# Altium PCB AT32.PcbDoc (part 2 of 9)
Units mm, origin at the board's own origin, x right, y up, seen from the top; angles counter-clockwise.
Board outline 152.1 x 84.6 mm, 2 copper layers (Top Layer, Bottom Layer); 49 components, 58 nets, 223 pads, 0 vias.
Unrouted connection lines stored in the file: 3.
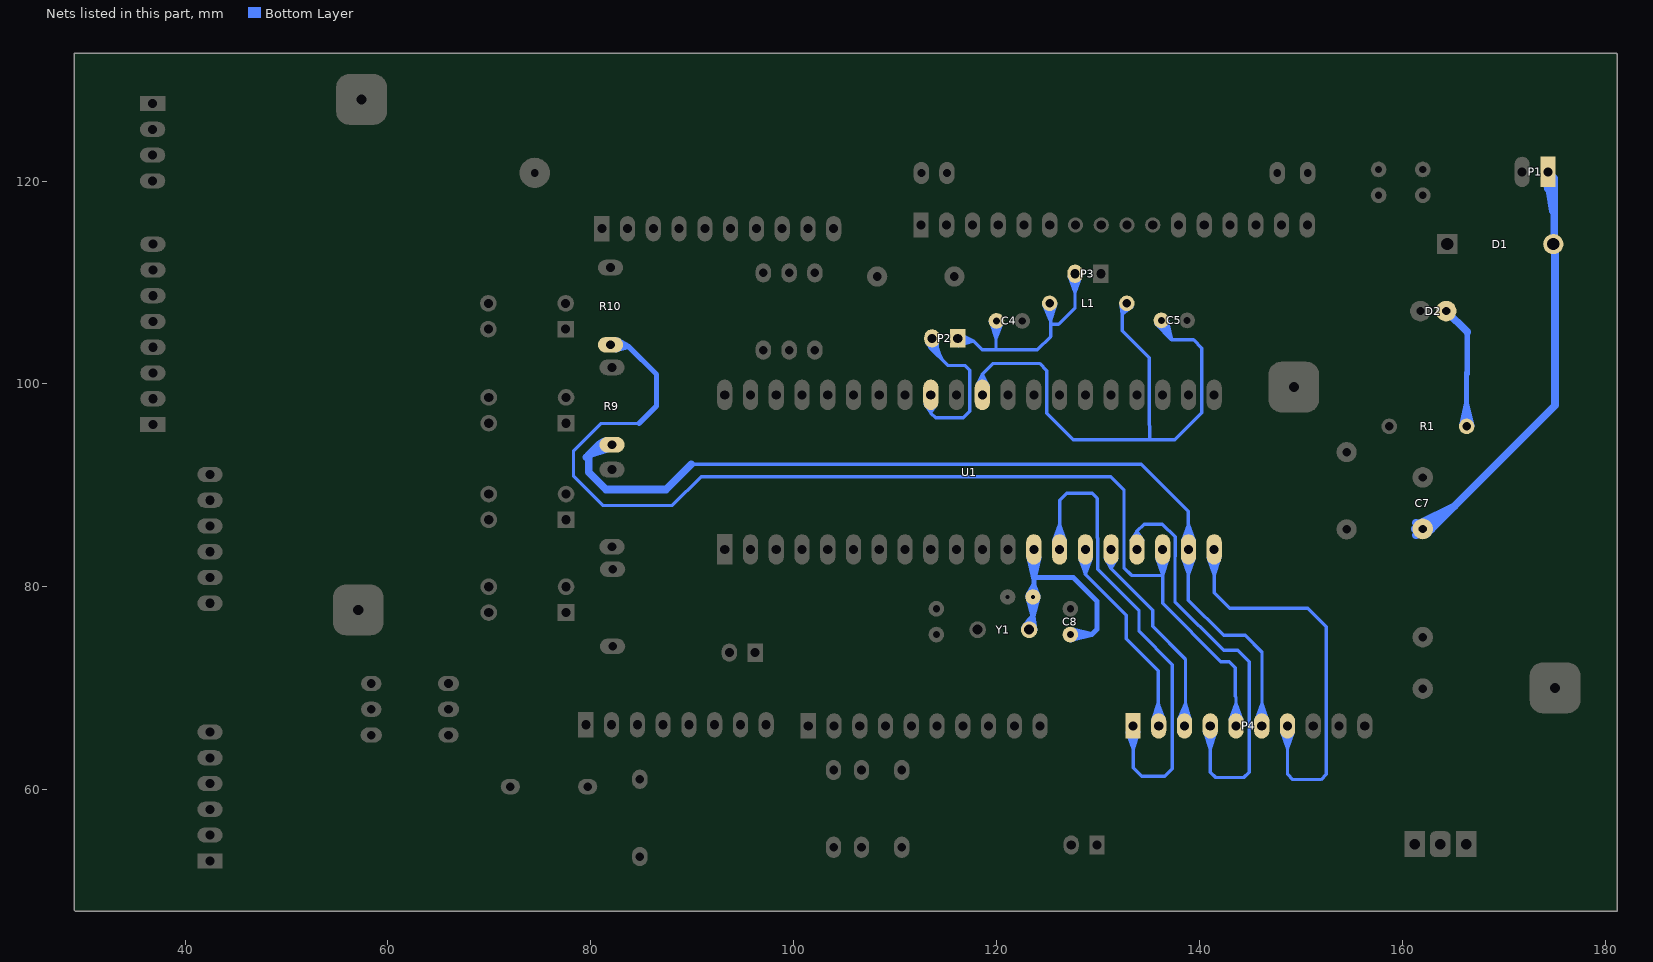
[diagram p2: the nets of this part, all layers, seen from the top]

## Nets (pads, with @x,y where several pads share a name; then routed paths per layer and width w, separated by ;. In a path a pad name is that pad's centre, name@x,y a point inside that pad or via, vN(x,y) a via of type N, cw(c..) or ccw(c..) an arc to the next point about the centre after c; other vN are vias at no path point) (continued)
NetC4_1: C4.1 L1.1 P2.1 P3.2 | length 269.3
  Bottom Layer w0.33: P2.1@116.188,104.228 117.748,104.228 ; P2.1@116.402,104.541 ccw(c117.058,105.07) 117.058,104.228 ; P2.1@116.616,103.941 cw(c117.309,103.248) 117.309,104.228 ; P2.1@116.659,104.749 ccw(c117.748,105.628) 117.748,104.228 ; C4.1@119.57,105.784 cw(c118.629,104.843) 119.96,104.843 ; 119.96,104.66 cw(c121.55,104.66) C4.1@120.426,105.784 ; L1.1@124.809,107.516 cw(c123.535,106.242) 125.337,106.242 ; L1.1@125.043,107.75 cw(c124.332,107.039) 125.337,107.039 ; 125.337,106.725 cw(c126.456,106.725) L1.1@125.665,107.516 ; L1.1@125.337,107.944 125.337,105.9 ; P3.2@127.322,110.307 cw(c126.289,109.274) 127.75,109.274 cw(c129.211,109.274) P3.2@128.178,110.307 ; P3.2@127.75,110.865 127.75,107.53 126.12,105.9 125.337,105.9 ; P2.1@116.187,104.094 117.748,104.228 ; P2.1@116.187,104.094 117.748,104.228 ; P2.1@116.187,104.094 117.748,104.228 ; P2.1@116.187,104.094 117.748,104.228 ; P2.1@116.187,104.094 117.748,104.228 ; P2.1@116.187,104.094 117.748,104.228 ; P2.1@116.187,104.094 117.748,104.228 ; P2.1@116.188,104.369 117.748,104.228 ; P2.1@116.188,104.369 117.748,104.228 ; P2.1@116.188,104.369 117.748,104.228 ; P2.1@116.188,104.369 117.748,104.228 ; P2.1@116.188,104.369 117.748,104.228 ; P2.1@116.188,104.369 117.748,104.228 ; P2.1@116.188,104.369 117.748,104.228 ; P2.1@116.237,104.639 117.748,104.228 ; P2.1@116.237,104.639 117.748,104.228 ; P2.1@116.237,104.639 117.748,104.228 ; P2.1@116.237,104.639 117.748,104.228 ; P2.1@116.237,104.639 117.748,104.228 ; P2.1@116.237,104.639 117.748,104.228 ; P2.1@116.237,104.639 117.748,104.228 ; P2.1@116.251,103.767 117.748,104.228 ; P2.1@116.251,103.767 117.748,104.228 ; P2.1@116.251,103.767 117.748,104.228 ; P2.1@116.251,103.767 117.748,104.228 ; P2.1@116.251,103.767 117.748,104.228 ; P2.1@116.251,103.767 117.748,104.228 ; P2.1@116.251,103.767 117.748,104.228 ; P2.1@116.358,104.949 117.748,104.228 ; P2.1@116.358,104.949 117.748,104.228 ; P2.1@116.358,104.949 117.748,104.228 ; P2.1@116.358,104.949 117.748,104.228 ; P2.1@116.358,104.949 117.748,104.228 ; P2.1@116.358,104.949 117.748,104.228 ; P2.1@116.358,104.949 117.748,104.228 ; 117.748,104.228 118.596,103.38 119.96,103.38 ; C4.1@119.4,106.121 119.96,104.451 ; C4.1@119.4,106.121 119.96,104.451 ; C4.1@119.4,106.121 119.96,104.451 ; C4.1@119.4,106.121 119.96,104.451 ; C4.1@119.4,106.121 119.96,104.451 ; C4.1@119.4,106.121 119.96,104.451 ; C4.1@119.4,106.121 119.96,104.452 ; C4.1@119.723,106.196 119.96,104.451 ; C4.1@119.723,106.196 119.96,104.451 ; C4.1@119.723,106.196 119.96,104.451 ; C4.1@119.723,106.196 119.96,104.451 ; C4.1@119.723,106.196 119.96,104.451 ; C4.1@119.723,106.196 119.96,104.451 ; C4.1@119.723,106.196 119.96,104.452 ; 119.96,103.38 124.04,103.38 125.337,104.677 125.337,105.9 ; 119.96,103.38 119.96,106.174 C4.1@119.998,106.212 ; 119.96,104.451 C4.1@120.592,106.095 ; 119.96,104.451 C4.1@120.272,106.185 ; 119.96,104.451 C4.1@119.998,106.212 ; 119.96,104.451 C4.1@120.592,106.095 ; 119.96,104.451 C4.1@120.272,106.185 ; 119.96,104.451 C4.1@119.998,106.212 ; 119.96,104.451 C4.1@120.592,106.095 ; 119.96,104.451 C4.1@120.272,106.185 ; 119.96,104.451 C4.1@119.998,106.212 ; 119.96,104.451 C4.1@120.592,106.095 ; 119.96,104.451 C4.1@120.272,106.185 ; 119.96,104.451 C4.1@119.998,106.212 ; 119.96,104.451 C4.1@120.592,106.095 ; 119.96,104.451 C4.1@120.272,106.185 ; 119.96,104.451 C4.1@119.998,106.212 ; 119.96,104.451 C4.1@120.592,106.095 ; 119.96,104.451 C4.1@120.272,106.185 ; 119.96,104.451 C4.1@119.998,106.212 ; 119.96,104.452 C4.1@120.592,106.095 ; 119.96,104.452 C4.1@120.272,106.185 ; L1.1@124.648,107.807 125.337,106.182 ; L1.1@124.648,107.807 125.337,106.182 ; L1.1@124.648,107.807 125.337,106.182 ; L1.1@124.648,107.807 125.337,106.182 ; L1.1@124.648,107.807 125.337,106.182 ; L1.1@124.648,107.807 125.337,106.182 ; L1.1@124.648,107.807 125.337,106.186 ; L1.1@124.964,107.907 125.337,106.182 ; L1.1@124.964,107.907 125.337,106.182 ; L1.1@124.964,107.907 125.337,106.182 ; L1.1@124.964,107.907 125.337,106.182 ; L1.1@124.964,107.907 125.337,106.182 ; L1.1@124.964,107.907 125.337,106.182 ; L1.1@124.964,107.907 125.337,106.186 ; L1.1@125.237,107.944 125.337,106.182 ; L1.1@125.237,107.944 125.337,106.182 ; L1.1@125.237,107.944 125.337,106.182 ; L1.1@125.237,107.944 125.337,106.182 ; L1.1@125.237,107.944 125.337,106.182 ; L1.1@125.237,107.944 125.337,106.182 ; 125.337,106.186 L1.1@125.838,107.874 ; 125.337,106.186 L1.1@125.512,107.938 ; 125.337,106.182 L1.1@125.838,107.874 ; 125.337,106.182 L1.1@125.512,107.938 ; 125.337,106.182 L1.1@125.838,107.874 ; 125.337,106.182 L1.1@125.512,107.938 ; 125.337,106.182 L1.1@125.838,107.874 ; 125.337,106.182 L1.1@125.512,107.938 ; 125.337,106.182 L1.1@125.838,107.874 ; 125.337,106.182 L1.1@125.512,107.938 ; 125.337,106.182 L1.1@125.838,107.874 ; 125.337,106.182 L1.1@125.512,107.938 ; 125.337,106.182 L1.1@125.838,107.874 ; 125.337,106.182 L1.1@125.512,107.938 ; P3.2@127.154,110.631 127.75,108.975 ; P3.2@127.154,110.631 127.75,108.975 ; P3.2@127.154,110.631 127.75,108.975 ; P3.2@127.154,110.631 127.75,108.975 ; P3.2@127.154,110.631 127.75,108.975 ; P3.2@127.154,110.631 127.75,108.975 ; P3.2@127.154,110.631 127.75,108.975 ; P3.2@127.476,110.714 127.75,108.975 ; P3.2@127.476,110.714 127.75,108.975 ; P3.2@127.476,110.714 127.75,108.975 ; P3.2@127.476,110.714 127.75,108.975 ; P3.2@127.476,110.714 127.75,108.975 ; P3.2@127.476,110.714 127.75,108.975 ; P3.2@127.476,110.714 127.75,108.975 ; 127.75,108.975 P3.2@128.346,110.631 ; 127.75,108.975 P3.2@128.024,110.714 ; 127.75,108.975 P3.2@127.75,110.735 ; 127.75,108.975 P3.2@128.346,110.631 ; 127.75,108.975 P3.2@128.024,110.714 ; 127.75,108.975 P3.2@127.75,110.735 ; 127.75,108.975 P3.2@128.346,110.631 ; 127.75,108.975 P3.2@128.024,110.714 ; 127.75,108.975 P3.2@127.75,110.735 ; 127.75,108.975 P3.2@128.346,110.631 ; 127.75,108.975 P3.2@128.024,110.714 ; 127.75,108.975 P3.2@127.75,110.735 ; 127.75,108.975 P3.2@128.346,110.631 ; 127.75,108.975 P3.2@128.024,110.714 ; 127.75,108.975 P3.2@127.75,110.735 ; 127.75,108.975 P3.2@128.346,110.631 ; 127.75,108.975 P3.2@128.024,110.714 ; 127.75,108.975 P3.2@127.75,110.735 ; 127.75,108.975 P3.2@128.346,110.631 ; 127.75,108.975 P3.2@128.024,110.714 ; 127.75,108.975 P3.2@127.75,110.735
NetC5_2: C5.2 L1.2 U1.30 | length 245.5
  Bottom Layer w0.33: U1.30@118.228,100.123 ccw(c117.526,100.951) 118.612,100.951 ; U1.30@118.606,98.927 118.407,99.126 118.612,99.331 118.612,100.952 ; U1.30@118.991,100.118 cw(c119.718,100.951) 118.612,100.951 ; L1.2@132.957,107.944 132.957,107.457 132.4,106.9 ; 135.06,97.32 135.1,94.5 ; 135.071,97.331 135.071,99.595 135.06,99.606 135.06,102.582 132.4,105.242 132.4,106.9 ; C5.2@135.762,105.908 137.151,104.489 ; C5.2@135.767,105.901 137.116,104.578 ; C5.2@135.774,105.892 137.131,104.617 ; C5.2@135.778,105.887 137.227,104.529 ; C5.2@135.779,105.885 137.172,104.607 ; C5.2@136.018,106.119 137.151,104.489 ; C5.2@136.019,106.117 137.116,104.578 ; C5.2@136.022,106.113 137.131,104.617 ; C5.2@136.024,106.109 137.172,104.607 ; C5.2@136.024,106.109 137.227,104.529 ; C5.2@136.209,106.292 ccw(c136.813,105.868) 136.291,105.346 ; C5.2@136.479,106.102 ccw(c137.139,105.639) 136.569,105.068 ; C5.2@136.503,106.378 137.227,104.529 ; C5.2@136.503,106.376 137.172,104.607 ; C5.2@136.506,106.371 137.131,104.617 ; C5.2@136.507,106.367 137.151,104.489 ; C5.2@136.507,106.367 137.116,104.578 ; C5.2@136.749,105.912 ccw(c137.465,105.41) 136.847,104.791 ; C5.2@136.82,106.473 137.227,104.529 ; C5.2@136.823,106.465 137.172,104.607 ; C5.2@136.827,106.454 137.131,104.617 ; C5.2@136.829,106.448 137.151,104.489 ; C5.2@136.83,106.446 137.116,104.578 ; U1.30@118.037,99.814 118.612,100.952 ; U1.30@118.037,99.814 118.612,100.952 ; U1.30@118.037,99.814 118.612,100.952 ; U1.30@118.037,99.814 118.612,100.952 ; U1.30@118.037,99.814 118.612,100.952 ; U1.30@118.037,99.814 118.612,100.952 ; U1.30@118.037,99.814 118.612,100.952 ; U1.30@118.352,99.704 118.612,100.952 ; U1.30@118.352,99.704 118.612,100.952 ; U1.30@118.352,99.704 118.612,100.952 ; U1.30@118.352,99.704 118.612,100.952 ; U1.30@118.352,99.704 118.612,100.952 ; U1.30@118.352,99.704 118.612,100.952 ; U1.30@118.352,99.704 118.612,100.952 ; U1.30@118.606,99.677 118.612,100.952 ; U1.30@118.606,99.677 118.612,100.952 ; U1.30@118.606,99.677 118.612,100.952 ; U1.30@118.606,99.677 118.612,100.952 ; U1.30@118.606,99.677 118.612,100.952 ; U1.30@118.606,99.677 118.612,100.952 ; U1.30@118.606,99.677 118.612,100.952 ; 118.612,100.952 119.68,102.02 124.245,102.02 124.96,101.305 124.96,97.1 127.56,94.5 137.6,94.5 140.24,97.14 140.24,103.54 139.428,104.352 137.285,104.352 136.3,105.337 ; 118.612,100.952 U1.30@119.176,99.809 ; 118.612,100.952 U1.30@118.86,99.701 ; 118.612,100.952 U1.30@119.176,99.809 ; 118.612,100.952 U1.30@118.86,99.701 ; 118.612,100.952 U1.30@119.176,99.809 ; 118.612,100.952 U1.30@118.86,99.701 ; 118.612,100.952 U1.30@119.176,99.809 ; 118.612,100.952 U1.30@118.86,99.701 ; 118.612,100.952 U1.30@119.176,99.809 ; 118.612,100.952 U1.30@118.86,99.701 ; 118.612,100.952 U1.30@119.176,99.809 ; 118.612,100.952 U1.30@118.86,99.701 ; 118.612,100.952 U1.30@119.176,99.809 ; 118.612,100.952 U1.30@118.86,99.701 ; L1.2@132.258,108.031 132.4,106.9 ; L1.2@132.258,108.031 132.4,106.9 ; L1.2@132.258,108.031 132.4,106.9 ; L1.2@132.258,108.031 132.4,106.9 ; L1.2@132.258,108.031 132.4,106.9 ; L1.2@132.258,108.031 132.4,106.9 ; L1.2@132.258,108.031 132.4,106.9 ; 132.4,106.9 L1.2@133.327,107.563 ; 132.4,106.9 L1.2@133.094,107.804 ; 132.4,106.9 L1.2@132.594,108.023 ; 132.4,106.9 L1.2@132.857,107.944 ; 132.4,106.9 L1.2@133.327,107.563 ; 132.4,106.9 L1.2@133.094,107.804 ; 132.4,106.9 L1.2@132.594,108.023 ; 132.4,106.9 L1.2@132.857,107.944 ; 132.4,106.9 L1.2@133.327,107.563 ; 132.4,106.9 L1.2@133.094,107.804 ; 132.4,106.9 L1.2@132.594,108.023 ; 132.4,106.9 L1.2@132.857,107.944 ; 132.4,106.9 L1.2@133.327,107.563 ; 132.4,106.9 L1.2@133.094,107.804 ; 132.4,106.9 L1.2@132.594,108.023 ; 132.4,106.9 L1.2@132.857,107.944 ; 132.4,106.9 L1.2@133.327,107.563 ; 132.4,106.9 L1.2@133.094,107.804 ; 132.4,106.9 L1.2@132.594,108.023 ; 132.4,106.9 L1.2@132.857,107.944 ; 132.4,106.9 L1.2@133.327,107.563 ; 132.4,106.9 L1.2@133.094,107.804 ; 132.4,106.9 L1.2@132.594,108.023 ; 132.4,106.9 L1.2@132.857,107.944 ; 132.4,106.9 L1.2@133.327,107.563 ; 132.4,106.9 L1.2@133.094,107.804 ; 132.4,106.9 L1.2@132.594,108.023 ; 132.4,106.9 L1.2@132.857,107.944 ; C5.2@135.693,106.034 136.3,105.337 ; C5.2@135.693,106.034 136.3,105.337 ; C5.2@135.693,106.034 136.3,105.337 ; C5.2@135.693,106.034 136.3,105.337 ; C5.2@135.693,106.034 136.3,105.337 ; C5.2@135.693,106.034 136.3,105.337 ; C5.2@135.693,106.034 136.3,105.337 ; C5.2@135.984,106.206 136.3,105.337 ; C5.2@135.984,106.206 136.3,105.337 ; C5.2@135.984,106.206 136.3,105.337 ; C5.2@135.984,106.206 136.3,105.337 ; C5.2@135.984,106.206 136.3,105.337 ; C5.2@135.984,106.206 136.3,105.337 ; C5.2@135.984,106.206 136.3,105.337 ; C5.2@136.254,106.26 137.258,104.379 ; C5.2@136.254,106.26 136.3,105.337 ; C5.2@136.254,106.26 136.3,105.337 ; C5.2@136.254,106.26 136.3,105.337 ; C5.2@136.254,106.26 136.3,105.337 ; C5.2@136.254,106.26 136.3,105.337 ; C5.2@136.254,106.26 137.227,104.529 ; C5.2@136.254,106.26 137.172,104.607 ; C5.2@136.254,106.26 137.258,104.379 ; C5.2@136.254,106.26 136.3,105.337 ; C5.2@136.254,106.26 137.151,104.489 ; C5.2@136.254,106.26 137.116,104.578 ; 136.3,105.337 C5.2@136.835,106.091 ; 136.3,105.337 C5.2@136.528,106.233 ; 136.3,105.337 C5.2@136.835,106.091 ; 136.3,105.337 C5.2@136.528,106.233 ; 136.3,105.337 C5.2@136.835,106.091 ; 136.3,105.337 C5.2@136.528,106.233 ; 136.3,105.337 C5.2@136.835,106.091 ; 136.3,105.337 C5.2@136.528,106.233 ; 136.3,105.337 C5.2@136.835,106.091 ; 136.3,105.337 C5.2@136.528,106.233 ; 136.3,105.337 C5.2@136.835,106.091 ; 136.3,105.337 C5.2@136.528,106.233 ; 136.3,105.337 C5.2@136.835,106.091 ; 136.3,105.337 C5.2@136.528,106.233 ; 137.258,104.379 136.823,106.466 137.258,104.379 ; 137.258,104.379 135.766,105.902 137.258,104.379 ; 137.258,104.379 136.504,106.374 137.258,104.379 ; 137.258,104.379 136.02,106.115 137.258,104.379
NetC7_1: C7.1 D1.1 P1.1 | length 70.4
  Bottom Layer w0.75: C7.1@161.228,85.704 C7.1@162.904,85.704 ; C7.1@161.351,85.075 C7.1@162.904,85.704 ; C7.1@161.351,86.333 C7.1@162.904,85.704 ; C7.1@161.681,85.251 cw(c162.776,84.156) 162.776,85.704 cw(c162.776,87.252) C7.1@161.681,86.157 ; C7.1@161.697,86.253 165.173,87.973 ; C7.1@162.028,85.704 165.173,87.973 ; C7.1@162.445,85.217 165.173,87.973 ; P1.1@174.103,119.893 cw(c173.463,119.253) 174.368,119.253 cw(c175.273,119.253) P1.1@174.633,119.893 ; P1.1@174.368,120.908 175,120.276 175,113.4 175.072,113.328 175.072,98.072 175.1,98.044 175.1,97.9 C7.1@162.904,85.704 ; P1.1@174.868,120.058 174.868,117.058 ; 174.868,117.058 174.368,120.158 174.868,117.058
NetC8_1: C8.1 pad.1@123.6,79 U1.13 Y1.2 | length 169.6
  Bottom Layer w0.33: U1.13@123.686,83.687 U1.13@124.16,83.213
  Bottom Layer w0.5: Y1.2@122.956,76.287 ccw(c122.733,76.72) 123.22,76.72 ; pad.1@123.238,78.638 cw(c122.364,77.764) 123.6,77.764 cw(c124.836,77.764) pad.1@123.962,78.638 ; pad.1@123.325,79.432 ccw(c122.986,79.965) 123.603,79.828 ; U1.13@123.332,82.583 cw(c122.479,81.73) 123.686,81.73 cw(c124.893,81.73) U1.13@124.04,82.583 ; Y1.2@123.484,76.287 cw(c123.707,76.72) 123.22,76.72 ; 123.604,79.831 ccw(c123.908,79.764) pad.1@123.791,79.475 ; 123.686,80.9 127.6,80.9 129.9,78.6 129.9,75.8 129.395,75.295 ; U1.13@123.686,83.687 123.686,80.2 ; C8.1@127.652,74.927 cw(c128.539,74.039) 128.539,75.295 cw(c128.539,76.55) C8.1@127.652,75.662 ; Y1.2@122.672,75.951 123.22,76.72 ; Y1.2@122.672,75.951 123.22,76.72 ; Y1.2@122.672,75.951 123.22,76.72 ; Y1.2@122.672,75.951 123.22,76.72 ; Y1.2@122.672,75.951 123.22,76.72 ; Y1.2@122.672,75.951 123.22,76.72 ; Y1.2@122.672,75.951 123.22,76.72 ; Y1.2@122.672,75.951 123.22,76.72 ; Y1.2@122.672,75.951 123.22,76.72 ; Y1.2@122.713,76.046 123.6,77.1 ; Y1.2@122.713,76.046 123.6,77.1 ; Y1.2@122.713,76.046 123.6,77.1 ; Y1.2@122.713,76.046 123.6,77.1 ; Y1.2@122.713,76.046 123.6,77.1 ; pad.1@123.093,78.931 123.6,77.1 ; pad.1@123.093,78.931 123.6,77.1 ; pad.1@123.093,78.931 123.6,77.1 ; pad.1@123.093,78.931 123.6,77.1 ; pad.1@123.093,78.931 123.6,77.1 ; pad.1@123.109,79.144 123.686,80.2 ; pad.1@123.109,79.144 123.686,80.2 ; pad.1@123.109,79.144 123.686,80.2 ; pad.1@123.109,79.144 123.686,80.2 ; pad.1@123.109,79.144 123.686,80.2 ; U1.13@123.189,82.881 123.686,80.687 ; U1.13@123.189,82.881 123.686,80.687 ; U1.13@123.189,82.881 123.686,80.687 ; U1.13@123.189,82.881 123.686,80.687 ; U1.13@123.189,82.881 123.686,80.687 ; Y1.2@123.22,75.776 123.22,76.72 ; Y1.2@123.22,75.776 123.6,77.1 ; Y1.2@123.22,75.776 123.22,76.72 ; Y1.2@123.22,75.776 123.6,77.1 ; Y1.2@123.22,75.776 123.6,77.1 ; Y1.2@123.22,75.776 123.22,76.72 ; Y1.2@123.22,75.776 123.22,76.72 ; Y1.2@123.22,75.776 123.22,76.72 ; Y1.2@123.22,75.776 123.6,77.1 ; Y1.2@123.22,75.776 123.22,76.72 ; Y1.2@123.22,75.776 123.22,76.72 ; 123.22,76.72 123.6,77.1 ; 123.22,76.72 Y1.2@123.768,75.951 ; 123.22,76.72 Y1.2@123.768,75.951 ; 123.22,76.72 Y1.2@123.768,75.951 ; 123.22,76.72 Y1.2@123.768,75.951 ; 123.22,76.72 Y1.2@123.768,75.951 ; 123.22,76.72 Y1.2@123.768,75.951 ; 123.22,76.72 Y1.2@123.768,75.951 ; 123.22,76.72 Y1.2@123.768,75.951 ; 123.22,76.72 Y1.2@123.768,75.951 ; 123.6,77.1 123.6,79.3 123.6,79.814 123.686,80.2 ; 123.6,77.1 Y1.2@123.794,75.736 ; 123.6,77.1 pad.1@124.107,78.931 ; 123.6,77.1 pad.1@123.6,79 ; 123.6,77.1 Y1.2@123.794,75.736 ; 123.6,77.1 Y1.2@123.794,75.736 ; 123.6,77.1 Y1.2@123.794,75.736 ; 123.6,77.1 Y1.2@123.794,75.736 ; 123.6,77.1 pad.1@124.107,78.931 ; 123.6,77.1 pad.1@123.6,79 ; 123.6,77.1 pad.1@124.107,78.931 ; 123.6,77.1 pad.1@123.6,79 ; 123.6,77.1 pad.1@124.107,78.931 ; 123.6,77.1 pad.1@124.107,78.931 ; 123.6,77.1 pad.1@123.6,79 ; pad.1@123.6,79 123.686,80.2 ; pad.1@123.6,79 123.686,80.2 ; pad.1@123.6,79 123.686,80.2 ; pad.1@123.6,79 123.686,80.2 ; 123.686,80.2 pad.1@124.107,79.073 ; 123.686,80.2 pad.1@124.107,79.073 ; 123.686,80.2 pad.1@124.107,79.073 ; 123.686,80.2 pad.1@124.107,79.073 ; 123.686,80.2 pad.1@124.107,79.073 ; 123.686,80.687 U1.13@124.183,82.881 ; 123.686,80.687 U1.13@123.686,82.937 ; 123.686,80.687 U1.13@124.183,82.881 ; 123.686,80.687 U1.13@123.686,82.937 ; 123.686,80.687 U1.13@124.183,82.881 ; 123.686,80.687 U1.13@123.686,82.937 ; 123.686,80.687 U1.13@124.183,82.881 ; 123.686,80.687 U1.13@123.686,82.937 ; 123.686,80.687 U1.13@124.183,82.881 ; 123.686,80.687 U1.13@123.686,82.937 ; C8.1@127.284,75.295 129.395,75.295 ; C8.1@127.284,75.295 129.395,75.295 ; C8.1@127.284,75.295 129.395,75.295 ; C8.1@127.348,74.779 129.395,75.295 ; C8.1@127.348,74.779 129.395,75.295 ; C8.1@127.348,74.779 129.395,75.295 ; C8.1@127.348,74.779 129.395,75.295 ; C8.1@127.348,75.811 129.395,75.295 ; C8.1@127.348,75.811 129.395,75.295 ; C8.1@127.348,75.811 129.395,75.295 ; C8.1@127.348,75.811 129.395,75.295
NetD2_1: D2.1 R1.1 | length 37
  Bottom Layer w0.5: R1.1@165.981,96.183 ccw(c165.094,97.07) 166.349,97.07 ccw(c167.604,97.07) R1.1@166.717,96.183 ; 166.349,101.147 R1.1@166.349,95.815 ; R1.1@165.832,95.875 166.349,98.085 ; R1.1@165.832,95.875 166.349,98.085 ; R1.1@165.832,95.875 166.349,98.085 ; R1.1@165.832,95.875 166.349,98.085 ; R1.1@166.349,95.815 166.349,98.085 ; R1.1@166.349,95.815 166.349,98.085 ; 166.349,98.085 R1.1@166.866,95.875 ; 166.349,98.085 R1.1@166.866,95.875 ; 166.349,98.085 R1.1@166.866,95.875 ; 166.349,98.085 R1.1@166.866,95.875
  Bottom Layer w0.55: 166.4,101 166.4,105.126
  Bottom Layer w0.75: D2.1@164.338,107.188 166.4,105.126
NetP2_2: P2.2 U1.32 | length 88.3
  Bottom Layer w0.33: P2.2@113.144,104.034 114.501,102.539 ; P2.2@113.15,104.025 114.471,102.646 P2.2@113.409,104.233 ; P2.2@113.159,104.012 114.491,102.699 ; U1.32@113.221,97.678 cw(c112.889,97.134) 113.526,97.134 cw(c114.163,97.134) U1.32@113.831,97.678 ; P2.2@113.279,104.478 ccw(c114.229,104.197) 113.528,103.496 ; P2.2@113.407,104.236 114.501,102.539 ; P2.2@113.412,104.227 114.491,102.699 ; P2.2@113.448,104.228 113.448,103.576 115.201,101.823 116.877,101.823 117.36,101.34 117.36,97.3 117.28,97.22 116.72,96.66 114,96.66 113.526,97.134 ; U1.32@113.526,98.927 113.526,97.134 ; P2.2@113.595,104.384 ccw(c114.834,104.017) 113.92,103.104 ; P2.2@113.905,104.468 114.501,102.539 ; P2.2@113.912,104.291 ccw(c115.439,103.838) 114.313,102.712 ; P2.2@114.228,104.197 ccw(c116.044,103.659) 114.705,102.319 ; U1.32@112.964,98.013 113.526,97.134 ; U1.32@112.964,98.013 113.526,97.134 ; U1.32@112.964,98.013 113.526,97.134 ; U1.32@112.964,98.013 113.526,97.134 ; U1.32@112.964,98.013 113.526,97.134 ; U1.32@112.964,98.013 113.526,97.134 ; U1.32@112.964,98.013 113.526,97.134 ; U1.32@113.273,98.146 113.526,97.134 ; U1.32@113.273,98.146 113.526,97.134 ; U1.32@113.273,98.146 113.526,97.134 ; U1.32@113.273,98.146 113.526,97.134 ; U1.32@113.273,98.146 113.526,97.134 ; U1.32@113.273,98.146 113.526,97.134 ; U1.32@113.273,98.146 113.526,97.134 ; 113.526,97.134 U1.32@114.088,98.013 ; 113.526,97.134 U1.32@113.779,98.146 ; 113.526,97.134 U1.32@113.526,98.177 ; 113.526,97.134 U1.32@114.088,98.013 ; 113.526,97.134 U1.32@113.779,98.146 ; 113.526,97.134 U1.32@113.526,98.177 ; 113.526,97.134 U1.32@114.088,98.013 ; 113.526,97.134 U1.32@113.779,98.146 ; 113.526,97.134 U1.32@113.526,98.177 ; 113.526,97.134 U1.32@114.088,98.013 ; 113.526,97.134 U1.32@113.779,98.146 ; 113.526,97.134 U1.32@113.526,98.177 ; 113.526,97.134 U1.32@114.088,98.013 ; 113.526,97.134 U1.32@113.779,98.146 ; 113.526,97.134 U1.32@113.526,98.177 ; 113.526,97.134 U1.32@114.088,98.013 ; 113.526,97.134 U1.32@113.779,98.146 ; 113.526,97.134 U1.32@113.526,98.177 ; 113.526,97.134 U1.32@114.088,98.013 ; 113.526,97.134 U1.32@113.779,98.146 ; 113.526,97.134 U1.32@113.526,98.177 ; P2.2@113.648,104.369 114.501,102.539 ; P2.2@113.648,104.369 114.491,102.699 ; P2.2@113.648,104.369 114.659,102.365 ; 114.659,102.365 113.15,104.026 114.659,102.365 ; 114.659,102.365 113.411,104.23 114.659,102.365
NetP4_1: P4.1 U1.14 | length 173.9
  Bottom Layer w0.33: U1.14@125.812,84.851 ccw(c124.814,85.849) 126.226,85.849 ccw(c127.638,85.849) U1.14@126.64,84.851 ; U1.14@126.226,83.687 126.226,88.527 126.926,89.228 129.435,89.228 129.951,88.712 129.951,84.852 129.991,84.812 129.991,83.03 129.98,83.019 129.98,81.72 134.061,77.639 134.061,75.607 137.336,72.332 137.336,62.056 136.59,61.31 134.321,61.31 133.478,62.153 P4.1@133.478,66.497 ; P4.1@133.042,65.372 cw(c131.99,64.321) 133.478,64.321 ; 133.478,64.427 cw(c134.815,64.427) P4.1@133.87,65.372 ; U1.14@125.649,84.535 126.226,86.177 ; U1.14@125.649,84.535 126.226,86.177 ; U1.14@125.649,84.535 126.226,86.177 ; U1.14@125.649,84.535 126.226,86.177 ; U1.14@125.649,84.535 126.226,86.177 ; U1.14@125.649,84.535 126.226,86.177 ; U1.14@125.649,84.535 126.226,86.177 ; U1.14@125.972,84.456 126.226,86.177 ; U1.14@125.972,84.456 126.226,86.177 ; U1.14@125.972,84.456 126.226,86.177 ; U1.14@125.972,84.456 126.226,86.177 ; U1.14@125.972,84.456 126.226,86.177 ; U1.14@125.972,84.456 126.226,86.177 ; U1.14@125.972,84.456 126.226,86.177 ; U1.14@126.226,84.437 126.226,86.177 ; U1.14@126.226,84.437 126.226,86.177 ; U1.14@126.226,84.437 126.226,86.177 ; U1.14@126.226,84.437 126.226,86.177 ; U1.14@126.226,84.437 126.226,86.177 ; U1.14@126.226,84.437 126.226,86.177 ; U1.14@126.226,84.437 126.226,86.177 ; 126.226,86.177 U1.14@126.803,84.535 ; 126.226,86.177 U1.14@126.48,84.456 ; 126.226,86.177 U1.14@126.803,84.535 ; 126.226,86.177 U1.14@126.48,84.456 ; 126.226,86.177 U1.14@126.803,84.535 ; 126.226,86.177 U1.14@126.48,84.456 ; 126.226,86.177 U1.14@126.803,84.535 ; 126.226,86.177 U1.14@126.48,84.456 ; 126.226,86.177 U1.14@126.803,84.535 ; 126.226,86.177 U1.14@126.48,84.456 ; 126.226,86.177 U1.14@126.803,84.535 ; 126.226,86.177 U1.14@126.48,84.456 ; 126.226,86.177 U1.14@126.803,84.535 ; 126.226,86.177 U1.14@126.48,84.456 ; P4.1@132.881,65.68 133.478,64.046 ; P4.1@132.881,65.68 133.478,64.046 ; P4.1@132.881,65.68 133.478,64.046 ; P4.1@132.881,65.68 133.478,64.046 ; P4.1@132.881,65.68 133.478,64.046 ; P4.1@132.881,65.68 133.478,64.046 ; P4.1@132.881,65.68 133.478,64.046 ; P4.1@133.202,65.764 133.478,64.046 ; P4.1@133.202,65.764 133.478,64.046 ; P4.1@133.202,65.764 133.478,64.046 ; P4.1@133.202,65.764 133.478,64.046 ; P4.1@133.202,65.764 133.478,64.046 ; P4.1@133.202,65.764 133.478,64.046 ; P4.1@133.202,65.764 133.478,64.046 ; P4.1@133.456,65.786 133.478,64.046 ; P4.1@133.456,65.786 133.478,64.046 ; P4.1@133.456,65.786 133.478,64.046 ; P4.1@133.456,65.786 133.478,64.046 ; P4.1@133.456,65.786 133.478,64.046 ; P4.1@133.456,65.786 133.478,64.046 ; P4.1@133.456,65.786 133.478,64.046 ; 133.478,64.046 P4.1@134.034,65.695 ; 133.478,64.046 P4.1@133.71,65.771 ; 133.478,64.046 P4.1@134.034,65.695 ; 133.478,64.046 P4.1@133.71,65.771 ; 133.478,64.046 P4.1@134.034,65.695 ; 133.478,64.046 P4.1@133.71,65.771 ; 133.478,64.046 P4.1@134.034,65.695 ; 133.478,64.046 P4.1@133.71,65.771 ; 133.478,64.046 P4.1@134.034,65.695 ; 133.478,64.046 P4.1@133.71,65.771 ; 133.478,64.046 P4.1@134.034,65.695 ; 133.478,64.046 P4.1@133.71,65.771 ; 133.478,64.046 P4.1@134.034,65.695 ; 133.478,64.046 P4.1@133.71,65.771
NetP4_2: P4.2 U1.15 | length 195.6
  Bottom Layer w0.33: U1.15@128.352,82.523 cw(c127.354,81.525) 128.766,81.525 cw(c130.178,81.525) U1.15@129.18,82.523 ; U1.15@128.766,83.687 128.766,81.234 ; P4.2@135.582,67.2 ccw(c134.714,68.068) 135.942,68.068 ; P4.2@135.598,67.215 ccw(c134.751,68.127) 135.996,68.127 ccw(c137.241,68.127) P4.2@136.394,67.215 ; P4.2@135.942,66.432 135.942,71.716 132.797,74.861 132.797,77.203 128.766,81.234 ; 135.942,68.329 ccw(c137.539,68.329) P4.2@136.41,67.2 ; U1.15@128.19,82.837 128.766,81.234 ; U1.15@128.19,82.837 128.766,81.234 ; U1.15@128.19,82.837 128.766,81.234 ; U1.15@128.19,82.837 128.766,81.234 ; U1.15@128.19,82.837 128.766,81.234 ; U1.15@128.19,82.837 128.766,81.234 ; U1.15@128.19,82.837 128.766,81.234 ; U1.15@128.512,82.918 128.766,81.234 ; U1.15@128.512,82.918 128.766,81.234 ; U1.15@128.512,82.918 128.766,81.234 ; U1.15@128.512,82.918 128.766,81.234 ; U1.15@128.512,82.918 128.766,81.234 ; U1.15@128.512,82.918 128.766,81.234 ; U1.15@128.512,82.918 128.766,81.234 ; 128.766,81.234 U1.15@129.342,82.837 ; 128.766,81.234 U1.15@129.02,82.918 ; 128.766,81.234 U1.15@128.766,82.937 ; 128.766,81.234 U1.15@129.342,82.837 ; 128.766,81.234 U1.15@129.02,82.918 ; 128.766,81.234 U1.15@128.766,82.937 ; 128.766,81.234 U1.15@129.342,82.837 ; 128.766,81.234 U1.15@129.02,82.918 ; 128.766,81.234 U1.15@128.766,82.937 ; 128.766,81.234 U1.15@129.342,82.837 ; 128.766,81.234 U1.15@129.02,82.918 ; 128.766,81.234 U1.15@128.766,82.937 ; 128.766,81.234 U1.15@129.342,82.837 ; 128.766,81.234 U1.15@129.02,82.918 ; 128.766,81.234 U1.15@128.766,82.937 ; 128.766,81.234 U1.15@129.342,82.837 ; 128.766,81.234 U1.15@129.02,82.918 ; 128.766,81.234 U1.15@128.766,82.937 ; 128.766,81.234 U1.15@129.342,82.837 ; 128.766,81.234 U1.15@129.02,82.918 ; 128.766,81.234 U1.15@128.766,82.937 ; P4.2@135.417,66.866 135.942,68.527 ; P4.2@135.417,66.866 135.942,68.527 ; P4.2@135.417,66.866 135.942,68.527 ; P4.2@135.417,66.866 135.942,68.527 ; P4.2@135.417,66.866 135.942,68.527 ; P4.2@135.417,66.866 135.942,68.526 ; P4.2@135.417,66.866 135.942,68.527 ; P4.2@135.425,66.914 135.996,68.127 ; P4.2@135.425,66.914 135.996,68.127 ; P4.2@135.425,66.914 135.996,68.127 ; P4.2@135.425,66.914 135.996,68.127 ; P4.2@135.425,66.914 135.996,68.127 ; P4.2@135.425,66.914 135.996,68.127 ; P4.2@135.425,66.914 135.996,68.127 ; P4.2@135.741,66.797 135.942,68.527 ; P4.2@135.741,66.797 135.942,68.527 ; P4.2@135.741,66.797 135.942,68.527 ; P4.2@135.741,66.797 135.942,68.527 ; P4.2@135.741,66.797 135.942,68.527 ; P4.2@135.741,66.797 135.942,68.526 ; P4.2@135.741,66.797 135.942,68.527 ; P4.2@135.742,66.81 135.996,68.127 ; P4.2@135.742,66.81 135.996,68.127 ; P4.2@135.742,66.81 135.996,68.127 ; P4.2@135.742,66.81 135.996,68.127 ; P4.2@135.742,66.81 135.996,68.127 ; P4.2@135.742,66.81 135.996,68.127 ; P4.2@135.742,66.81 135.996,68.127 ; 135.942,68.526 P4.2@136.569,66.902 ; 135.942,68.526 P4.2@136.25,66.813 ; 135.942,68.526 P4.2@135.996,66.786 ; 135.942,68.527 P4.2@136.569,66.902 ; 135.942,68.527 P4.2@136.25,66.813 ; 135.942,68.527 P4.2@135.996,66.786 ; 135.942,68.527 P4.2@136.569,66.902 ; 135.942,68.527 P4.2@136.25,66.813 ; 135.942,68.527 P4.2@135.996,66.786 ; 135.942,68.527 P4.2@136.569,66.902 ; 135.942,68.527 P4.2@136.25,66.813 ; 135.942,68.527 P4.2@135.996,66.786 ; 135.942,68.527 P4.2@136.569,66.902 ; 135.942,68.527 P4.2@136.25,66.813 ; 135.942,68.527 P4.2@135.996,66.786 ; 135.942,68.527 P4.2@136.569,66.902 ; 135.942,68.527 P4.2@136.25,66.813 ; 135.942,68.527 P4.2@135.996,66.786 ; 135.942,68.527 P4.2@136.569,66.902 ; 135.942,68.527 P4.2@136.25,66.813 ; 135.942,68.527 P4.2@135.996,66.786 ; P4.2@135.996,66.786 135.996,68.127 ; P4.2@135.996,66.786 135.996,68.127 ; P4.2@135.996,66.786 135.996,68.127 ; P4.2@135.996,66.786 135.996,68.127 ; P4.2@135.996,66.786 135.996,68.127 ; P4.2@135.996,66.786 135.996,68.127 ; P4.2@135.996,66.786 135.996,68.127 ; P4.2@135.996,66.786 135.996,68.127 ; 135.996,68.127 P4.2@136.567,66.914 ; 135.996,68.127 P4.2@136.25,66.81 ; 135.996,68.127 P4.2@136.567,66.914 ; 135.996,68.127 P4.2@136.25,66.81 ; 135.996,68.127 P4.2@136.567,66.914 ; 135.996,68.127 P4.2@136.25,66.81 ; 135.996,68.127 P4.2@136.567,66.914 ; 135.996,68.127 P4.2@136.25,66.81 ; 135.996,68.127 P4.2@136.567,66.914 ; 135.996,68.127 P4.2@136.25,66.81 ; 135.996,68.127 P4.2@136.567,66.914 ; 135.996,68.127 P4.2@136.25,66.81 ; 135.996,68.127 P4.2@136.567,66.914 ; 135.996,68.127 P4.2@136.25,66.81
NetP4_3: P4.3 U1.16 | length 126
  Bottom Layer w0.33: U1.16@130.964,82.462 cw(c130.482,81.794) 131.306,81.794 ; U1.16@131.306,83.687 131.306,81.794 ; U1.16@131.648,82.462 ccw(c132.13,81.794) 131.306,81.794 ; P4.3@137.966,66.916 138.632,68.525 ; P4.3@138.122,67.2 ccw(c136.892,68.43) 138.632,68.43 ; P4.3@138.356,66.966 ccw(c137.688,67.634) 138.632,67.634 ; P4.3@138.438,66.4 138.632,66.594 138.632,72.884 135.423,76.093 135.423,77.681 133.478,79.626 133.474,79.626 131.306,81.794 ; 138.632,67.966 ccw(c139.716,67.966) P4.3@138.95,67.2 ; U1.16@130.74,82.787 131.306,81.794 ; U1.16@130.74,82.787 131.306,81.794 ; U1.16@130.74,82.787 131.306,81.794 ; U1.16@130.74,82.787 131.306,81.794 ; U1.16@130.74,82.787 131.306,81.794 ; U1.16@130.74,82.787 131.306,81.794 ; U1.16@130.74,82.787 131.306,81.794 ; U1.16@131.053,82.909 131.306,81.794 ; U1.16@131.053,82.909 131.306,81.794 ; U1.16@131.053,82.909 131.306,81.794 ; U1.16@131.053,82.909 131.306,81.794 ; U1.16@131.053,82.909 131.306,81.794 ; U1.16@131.053,82.909 131.306,81.794 ; U1.16@131.053,82.909 131.306,81.794 ; 131.306,81.794 U1.16@131.871,82.787 ; 131.306,81.794 U1.16@131.559,82.909 ; 131.306,81.794 U1.16@131.306,82.937 ; 131.306,81.794 U1.16@131.871,82.787 ; 131.306,81.794 U1.16@131.559,82.909 ; 131.306,81.794 U1.16@131.306,82.937 ; 131.306,81.794 U1.16@131.871,82.787 ; 131.306,81.794 U1.16@131.559,82.909 ; 131.306,81.794 U1.16@131.306,82.937 ; 131.306,81.794 U1.16@131.871,82.787 ; 131.306,81.794 U1.16@131.559,82.909 ; 131.306,81.794 U1.16@131.306,82.937 ; 131.306,81.794 U1.16@131.871,82.787 ; 131.306,81.794 U1.16@131.559,82.909 ; 131.306,81.794 U1.16@131.306,82.937 ; 131.306,81.794 U1.16@131.871,82.787 ; 131.306,81.794 U1.16@131.559,82.909 ; 131.306,81.794 U1.16@131.306,82.937 ; 131.306,81.794 U1.16@131.871,82.787 ; 131.306,81.794 U1.16@131.559,82.909 ; 131.306,81.794 U1.16@131.306,82.937 ; P4.3@137.965,66.916 138.632,68.529 ; P4.3@137.965,66.916 138.632,68.529 ; P4.3@137.965,66.916 138.632,68.529 ; P4.3@137.965,66.916 138.632,68.529 ; P4.3@137.965,66.916 138.632,68.529 ; P4.3@137.965,66.916 138.632,68.529 ; P4.3@138.283,66.819 138.632,68.529 ; P4.3@138.283,66.819 138.632,68.529 ; P4.3@138.283,66.819 138.632,68.529 ; P4.3@138.283,66.819 138.632,68.529 ; P4.3@138.283,66.819 138.632,68.529 ; P4.3@138.283,66.819 138.632,68.529 ; P4.3@138.283,66.819 138.632,68.525 ; P4.3@138.536,66.786 138.632,68.529 ; P4.3@138.536,66.786 138.632,68.529 ; P4.3@138.536,66.786 138.632,68.529 ; P4.3@138.536,66.786 138.632,68.529 ; P4.3@138.536,66.786 138.632,68.529 ; P4.3@138.536,66.786 138.632,68.529 ; P4.3@138.536,66.786 138.632,68.525 ; 138.632,68.525 P4.3@139.117,66.852 ; 138.632,68.525 P4.3@138.791,66.791 ; 138.632,68.529 P4.3@139.117,66.852 ; 138.632,68.529 P4.3@138.791,66.791 ; 138.632,68.529 P4.3@139.117,66.852 ; 138.632,68.529 P4.3@138.791,66.791 ; 138.632,68.529 P4.3@139.117,66.852 ; 138.632,68.529 P4.3@138.791,66.791 ; 138.632,68.529 P4.3@139.117,66.852 ; 138.632,68.529 P4.3@138.791,66.791 ; 138.632,68.529 P4.3@139.117,66.852 ; 138.632,68.529 P4.3@138.791,66.791 ; 138.632,68.529 P4.3@139.117,66.852 ; 138.632,68.529 P4.3@138.791,66.791
NetP4_4: P4.4 U1.17 | length 143.2
  Bottom Layer w0.33: U1.17@133.547,84.94 ccw(c133.234,85.466) 133.846,85.466 ; U1.17@133.846,83.687 133.846,85.466 ; U1.17@134.145,84.94 cw(c134.458,85.466) 133.846,85.466 ; P4.4@140.662,65.372 cw(c139.664,64.374) 141.076,64.374 cw(c142.488,64.374) P4.4@141.49,65.372 ; P4.4@141.076,66.786 P4.4@141.076,66.286 141.076,61.724 141.6,61.2 144.4,61.2 144.919,61.719 144.919,68.719 ; 144.922,68.665 144.922,72.604 143.783,73.743 142.394,73.743 137.6,78.537 137.6,83.019 137.611,83.03 137.611,84.929 136.36,86.18 134.56,86.18 133.846,85.466 ; U1.17@133.285,84.603 133.846,85.466 ; U1.17@133.285,84.603 133.846,85.466 ; U1.17@133.285,84.603 133.846,85.466 ; U1.17@133.285,84.603 133.846,85.466 ; U1.17@133.285,84.603 133.846,85.466 ; U1.17@133.285,84.603 133.846,85.466 ; U1.17@133.285,84.603 133.846,85.466 ; U1.17@133.593,84.469 133.846,85.466 ; U1.17@133.593,84.469 133.846,85.466 ; U1.17@133.593,84.469 133.846,85.466 ; U1.17@133.593,84.469 133.846,85.466 ; U1.17@133.593,84.469 133.846,85.466 ; U1.17@133.593,84.469 133.846,85.466 ; U1.17@133.593,84.469 133.846,85.466 ; U1.17@133.846,84.437 133.846,85.466 ; U1.17@133.846,84.437 133.846,85.466 ; U1.17@133.846,84.437 133.846,85.466 ; U1.17@133.846,84.437 133.846,85.466 ; U1.17@133.846,84.437 133.846,85.466 ; U1.17@133.846,84.437 133.846,85.466 ; U1.17@133.846,84.437 133.846,85.466 ; 133.846,85.466 U1.17@134.407,84.603 ; 133.846,85.466 U1.17@134.099,84.469 ; 133.846,85.466 U1.17@134.407,84.603 ; 133.846,85.466 U1.17@134.099,84.469 ; 133.846,85.466 U1.17@134.407,84.603 ; 133.846,85.466 U1.17@134.099,84.469 ; 133.846,85.466 U1.17@134.407,84.603 ; 133.846,85.466 U1.17@134.099,84.469 ; 133.846,85.466 U1.17@134.407,84.603 ; 133.846,85.466 U1.17@134.099,84.469 ; 133.846,85.466 U1.17@134.407,84.603 ; 133.846,85.466 U1.17@134.099,84.469 ; 133.846,85.466 U1.17@134.407,84.603 ; 133.846,85.466 U1.17@134.099,84.469 ; P4.4@140.499,65.688 141.076,64.046 ; P4.4@140.499,65.688 141.076,64.046 ; P4.4@140.499,65.688 141.076,64.046 ; P4.4@140.499,65.688 141.076,64.046 ; P4.4@140.499,65.688 141.076,64.046 ; P4.4@140.499,65.688 141.076,64.046 ; P4.4@140.499,65.688 141.076,64.046 ; P4.4@140.822,65.767 141.076,64.046 ; P4.4@140.822,65.767 141.076,64.046 ; P4.4@140.822,65.767 141.076,64.046 ; P4.4@140.822,65.767 141.076,64.046 ; P4.4@140.822,65.767 141.076,64.046 ; P4.4@140.822,65.767 141.076,64.046 ; P4.4@140.822,65.767 141.076,64.046 ; 141.076,64.046 P4.4@141.653,65.688 ; 141.076,64.046 P4.4@141.33,65.767 ; 141.076,64.046 P4.4@141.076,65.786 ; 141.076,64.046 P4.4@141.653,65.688 ; 141.076,64.046 P4.4@141.33,65.767 ; 141.076,64.046 P4.4@141.076,65.786 ; 141.076,64.046 P4.4@141.653,65.688 ; 141.076,64.046 P4.4@141.33,65.767 ; 141.076,64.046 P4.4@141.076,65.786 ; 141.076,64.046 P4.4@141.653,65.688 ; 141.076,64.046 P4.4@141.33,65.767 ; 141.076,64.046 P4.4@141.076,65.786 ; 141.076,64.046 P4.4@141.653,65.688 ; 141.076,64.046 P4.4@141.33,65.767 ; 141.076,64.046 P4.4@141.076,65.786 ; 141.076,64.046 P4.4@141.653,65.688 ; 141.076,64.046 P4.4@141.33,65.767 ; 141.076,64.046 P4.4@141.076,65.786 ; 141.076,64.046 P4.4@141.653,65.688 ; 141.076,64.046 P4.4@141.33,65.767 ; 141.076,64.046 P4.4@141.076,65.786
NetP4_5: P4.5 R10.1 U1.18 | length 257.6
  Bottom Layer w0.33: 84.76,96.1 81,96.1 78.3,93.4 78.3,90.9 81.178,88.022 88.042,88.022 90.871,90.851 131.28,90.851 132.572,89.56 132.572,81.86 133.314,81.118 136.386,81.118 ; U1.18@135.972,82.523 cw(c134.974,81.525) 136.386,81.525 cw(c137.798,81.525) U1.18@136.8,82.523 ; U1.18@136.386,83.687 136.386,78.362 142.124,72.624 142.944,72.624 143.56,72.008 143.56,69.22 ; P4.5@143.202,67.2 ccw(c142.204,68.198) 143.616,68.198 ccw(c145.028,68.198) P4.5@144.03,67.2 ; 143.616,69.116 P4.5@143.616,66.786 ; U1.18@135.809,82.839 136.386,81.197 ; U1.18@135.809,82.839 136.386,81.197 ; U1.18@135.809,82.839 136.386,81.197 ; U1.18@135.809,82.839 136.386,81.197 ; U1.18@135.809,82.839 136.386,81.197 ; U1.18@135.809,82.839 136.386,81.197 ; U1.18@135.809,82.839 136.386,81.197 ; U1.18@136.132,82.918 136.386,81.197 ; U1.18@136.132,82.918 136.386,81.197 ; U1.18@136.132,82.918 136.386,81.197 ; U1.18@136.132,82.918 136.386,81.197 ; U1.18@136.132,82.918 136.386,81.197 ; U1.18@136.132,82.918 136.386,81.197 ; U1.18@136.132,82.918 136.386,81.197 ; 136.386,81.197 U1.18@136.963,82.839 ; 136.386,81.197 U1.18@136.64,82.918 ; 136.386,81.197 U1.18@136.386,82.937 ; 136.386,81.197 U1.18@136.963,82.839 ; 136.386,81.197 U1.18@136.64,82.918 ; 136.386,81.197 U1.18@136.386,82.937 ; 136.386,81.197 U1.18@136.963,82.839 ; 136.386,81.197 U1.18@136.64,82.918 ; 136.386,81.197 U1.18@136.386,82.937 ; 136.386,81.197 U1.18@136.963,82.839 ; 136.386,81.197 U1.18@136.64,82.918 ; 136.386,81.197 U1.18@136.386,82.937 ; 136.386,81.197 U1.18@136.963,82.839 ; 136.386,81.197 U1.18@136.64,82.918 ; 136.386,81.197 U1.18@136.386,82.937 ; 136.386,81.197 U1.18@136.963,82.839 ; 136.386,81.197 U1.18@136.64,82.918 ; 136.386,81.197 U1.18@136.386,82.937 ; 136.386,81.197 U1.18@136.963,82.839 ; 136.386,81.197 U1.18@136.64,82.918 ; 136.386,81.197 U1.18@136.386,82.937 ; P4.5@143.039,66.884 143.616,68.526 ; P4.5@143.039,66.884 143.616,68.526 ; P4.5@143.039,66.884 143.616,68.526 ; P4.5@143.039,66.884 143.616,68.526 ; P4.5@143.039,66.884 143.616,68.526 ; P4.5@143.039,66.884 143.616,68.526 ; P4.5@143.039,66.884 143.616,68.526 ; P4.5@143.362,66.805 143.616,68.526 ; P4.5@143.362,66.805 143.616,68.526 ; P4.5@143.362,66.805 143.616,68.526 ; P4.5@143.362,66.805 143.616,68.526 ; P4.5@143.362,66.805 143.616,68.526 ; P4.5@143.362,66.805 143.616,68.526 ; P4.5@143.362,66.805 143.616,68.526 ; P4.5@143.616,66.786 143.616,68.526 ; P4.5@143.616,66.786 143.616,68.526 ; P4.5@143.616,66.786 143.616,68.526 ; P4.5@143.616,66.786 143.616,68.526 ; P4.5@143.616,66.786 143.616,68.526 ; P4.5@143.616,66.786 143.616,68.526 ; P4.5@143.616,66.786 143.616,68.526 ; 143.616,68.526 P4.5@144.193,66.884 ; 143.616,68.526 P4.5@143.87,66.805 ; 143.616,68.526 P4.5@144.193,66.884 ; 143.616,68.526 P4.5@143.87,66.805 ; 143.616,68.526 P4.5@144.193,66.884 ; 143.616,68.526 P4.5@143.87,66.805 ; 143.616,68.526 P4.5@144.193,66.884 ; 143.616,68.526 P4.5@143.87,66.805 ; 143.616,68.526 P4.5@144.193,66.884 ; 143.616,68.526 P4.5@143.87,66.805 ; 143.616,68.526 P4.5@144.193,66.884 ; 143.616,68.526 P4.5@143.87,66.805 ; 143.616,68.526 P4.5@144.193,66.884 ; 143.616,68.526 P4.5@143.87,66.805
  Bottom Layer w0.5: R10.1@82.3,103.7 83.725,103.7 ; R10.1@82.8,103.49 cw(c83.306,102.984) 83.306,103.7 ; R10.1@82.86,104.154 ccw(c83.725,104.753) 83.725,103.7 ; 84.76,96.1 86.48,97.82 86.48,100.945 83.725,103.7 ; R10.1@82.432,103.858 83.725,103.7 ; R10.1@82.432,103.858 83.725,103.7 ; R10.1@82.432,103.858 83.725,103.7 ; R10.1@82.432,103.858 83.725,103.7 ; R10.1@82.432,103.858 83.725,103.7 ; R10.1@82.473,103.34 83.725,103.7 ; R10.1@82.473,103.34 83.725,103.7 ; R10.1@82.473,103.34 83.725,103.7 ; R10.1@82.473,103.34 83.725,103.7 ; R10.1@82.473,103.34 83.725,103.7 ; R10.1@82.597,104.351 83.725,103.7 ; R10.1@82.597,104.351 83.725,103.7 ; R10.1@82.597,104.351 83.725,103.7 ; R10.1@82.597,104.351 83.725,103.7 ; R10.1@82.597,104.351 83.725,103.7
NetP4_6: P4.6 R9.1 U1.19 | length 316
  Bottom Layer w0.33: 89.889,92.069 134.295,92.069 138.926,87.439 U1.19@138.926,83.687 138.926,78.679 142.391,75.214 144.515,75.214 146.181,73.548 P4.6@146.181,66.484 ; U1.19@138.512,82.523 cw(c137.514,81.525) 138.926,81.525 cw(c140.338,81.525) U1.19@139.34,82.523 ; U1.19@138.512,84.851 ccw(c137.514,85.849) 138.926,85.849 ccw(c140.338,85.849) U1.19@139.34,84.851 ; P4.6@145.742,67.2 ccw(c144.683,68.259) 146.181,68.259 ; 146.181,68.138 ccw(c147.508,68.138) P4.6@146.57,67.2 ; U1.19@138.349,82.839 138.926,81.197 ; U1.19@138.349,82.839 138.926,81.197 ; U1.19@138.349,82.839 138.926,81.197 ; U1.19@138.349,82.839 138.926,81.197 ; U1.19@138.349,82.839 138.926,81.197 ; U1.19@138.349,82.839 138.926,81.197 ; U1.19@138.349,82.839 138.926,81.197 ; U1.19@138.349,84.535 138.926,86.177 ; U1.19@138.349,84.535 138.926,86.177 ; U1.19@138.349,84.535 138.926,86.177 ; U1.19@138.349,84.535 138.926,86.177 ; U1.19@138.349,84.535 138.926,86.177 ; U1.19@138.349,84.535 138.926,86.177 ; U1.19@138.349,84.535 138.926,86.177 ; U1.19@138.672,82.918 138.926,81.197 ; U1.19@138.672,82.918 138.926,81.197 ; U1.19@138.672,82.918 138.926,81.197 ; U1.19@138.672,82.918 138.926,81.197 ; U1.19@138.672,82.918 138.926,81.197 ; U1.19@138.672,82.918 138.926,81.197 ; U1.19@138.672,82.918 138.926,81.197 ; U1.19@138.672,84.456 138.926,86.177 ; U1.19@138.672,84.456 138.926,86.177 ; U1.19@138.672,84.456 138.926,86.177 ; U1.19@138.672,84.456 138.926,86.177 ; U1.19@138.672,84.456 138.926,86.177 ; U1.19@138.672,84.456 138.926,86.177 ; U1.19@138.672,84.456 138.926,86.177 ; 138.926,81.197 U1.19@139.503,82.839 ; 138.926,81.197 U1.19@139.18,82.918 ; 138.926,81.197 U1.19@138.926,82.937 ; 138.926,81.197 U1.19@139.503,82.839 ; 138.926,81.197 U1.19@139.18,82.918 ; 138.926,81.197 U1.19@138.926,82.937 ; 138.926,81.197 U1.19@139.503,82.839 ; 138.926,81.197 U1.19@139.18,82.918 ; 138.926,81.197 U1.19@138.926,82.937 ; 138.926,81.197 U1.19@139.503,82.839 ; 138.926,81.197 U1.19@139.18,82.918 ; 138.926,81.197 U1.19@138.926,82.937 ; 138.926,81.197 U1.19@139.503,82.839 ; 138.926,81.197 U1.19@139.18,82.918 ; 138.926,81.197 U1.19@138.926,82.937 ; 138.926,81.197 U1.19@139.503,82.839 ; 138.926,81.197 U1.19@139.18,82.918 ; 138.926,81.197 U1.19@138.926,82.937 ; 138.926,81.197 U1.19@139.503,82.839 ; 138.926,81.197 U1.19@139.18,82.918 ; 138.926,81.197 U1.19@138.926,82.937 ; U1.19@138.926,84.437 138.926,86.177 ; U1.19@138.926,84.437 138.926,86.177 ; U1.19@138.926,84.437 138.926,86.177 ; U1.19@138.926,84.437 138.926,86.177 ; U1.19@138.926,84.437 138.926,86.177 ; U1.19@138.926,84.437 138.926,86.177 ; U1.19@138.926,84.437 138.926,86.177 ; 138.926,86.177 U1.19@139.503,84.535 ; 138.926,86.177 U1.19@139.18,84.456 ; 138.926,86.177 U1.19@139.503,84.535 ; 138.926,86.177 U1.19@139.18,84.456 ; 138.926,86.177 U1.19@139.503,84.535 ; 138.926,86.177 U1.19@139.18,84.456 ; 138.926,86.177 U1.19@139.503,84.535 ; 138.926,86.177 U1.19@139.18,84.456 ; 138.926,86.177 U1.19@139.503,84.535 ; 138.926,86.177 U1.19@139.18,84.456 ; 138.926,86.177 U1.19@139.503,84.535 ; 138.926,86.177 U1.19@139.18,84.456 ; 138.926,86.177 U1.19@139.503,84.535 ; 138.926,86.177 U1.19@139.18,84.456 ; P4.6@145.581,66.893 146.181,68.526 ; P4.6@145.581,66.893 146.181,68.526 ; P4.6@145.581,66.893 146.181,68.526 ; P4.6@145.581,66.893 146.181,68.526 ; P4.6@145.581,66.893 146.181,68.526 ; P4.6@145.581,66.893 146.181,68.526 ; P4.6@145.581,66.893 146.181,68.526 ; P4.6@145.902,66.808 146.181,68.526 ; P4.6@145.902,66.808 146.181,68.526 ; P4.6@145.902,66.808 146.181,68.526 ; P4.6@145.902,66.808 146.181,68.526 ; P4.6@145.902,66.808 146.181,68.526 ; P4.6@145.902,66.808 146.181,68.526 ; P4.6@145.902,66.808 146.181,68.526 ; P4.6@146.156,66.786 146.181,68.526 ; P4.6@146.156,66.786 146.181,68.526 ; P4.6@146.156,66.786 146.181,68.526 ; P4.6@146.156,66.786 146.181,68.526 ; P4.6@146.156,66.786 146.181,68.526 ; P4.6@146.156,66.786 146.181,68.526 ; P4.6@146.156,66.786 146.181,68.526 ; 146.181,68.526 P4.6@146.734,66.876 ; 146.181,68.526 P4.6@146.411,66.801 ; 146.181,68.526 P4.6@146.734,66.876 ; 146.181,68.526 P4.6@146.411,66.801 ; 146.181,68.526 P4.6@146.734,66.876 ; 146.181,68.526 P4.6@146.411,66.801 ; 146.181,68.526 P4.6@146.734,66.876 ; 146.181,68.526 P4.6@146.411,66.801 ; 146.181,68.526 P4.6@146.734,66.876 ; 146.181,68.526 P4.6@146.411,66.801 ; 146.181,68.526 P4.6@146.734,66.876 ; 146.181,68.526 P4.6@146.411,66.801 ; 146.181,68.526 P4.6@146.734,66.876 ; 146.181,68.526 P4.6@146.411,66.801
  Bottom Layer w0.75: 79.562,92.762 cw(c81.612,90.712) R9.1@81.612,93.611 ; 80.842,94.042 cw(c81.612,93.272) R9.1@81.612,94.361 ; R9.1@82.092,94.006 80.806,94.006 79.8,93 ; 89.889,92.069 87.42,89.6 81.5,89.6 79.8,91.3 79.8,93 ; 79.8,93 R9.1@81.77,93.644 ; 79.8,93 R9.1@81.388,94.332 ; 79.8,93 R9.1@81.612,94.006 ; 79.8,93 R9.1@81.77,93.644 ; 79.8,93 R9.1@81.388,94.332 ; 79.8,93 R9.1@81.612,94.006 ; 79.8,93 R9.1@81.77,93.644 ; 79.8,93 R9.1@81.388,94.332 ; 79.8,93 R9.1@81.612,94.006 ; 79.8,93 R9.1@81.77,93.644 ; 79.8,93 R9.1@81.388,94.332 ; 79.8,93 R9.1@81.612,94.006 ; 79.8,93 R9.1@81.77,93.644 ; 79.8,93 R9.1@81.388,94.332 ; 79.8,93 R9.1@81.612,94.006
NetP4_7: P4.7 U1.20 | length 166.8
  Bottom Layer w0.33: U1.20@141.052,82.523 cw(c140.054,81.525) 141.466,81.525 cw(c142.878,81.525) U1.20@141.88,82.523 ; U1.20@141.466,83.687 141.466,79.406 142.982,77.89 150.678,77.89 152.51,76.058 ; P4.7@148.282,65.372 cw(c147.284,64.374) 148.696,64.374 cw(c150.108,64.374) P4.7@149.11,65.372 ; P4.7@148.696,66.6 P4.7@148.696,66.286 148.696,61.504 149.2,61 152,61 152.5,61.5 152.5,62.626 ; 152.5,62.6 152.5,62.626 ; 152.5,76.046 152.5,62.626 ; U1.20@140.889,82.839 141.466,81.197 ; U1.20@140.889,82.839 141.466,81.197 ; U1.20@140.889,82.839 141.466,81.197 ; U1.20@140.889,82.839 141.466,81.197 ; U1.20@140.889,82.839 141.466,81.197 ; U1.20@140.889,82.839 141.466,81.197 ; U1.20@140.889,82.839 141.466,81.197 ; U1.20@141.212,82.918 141.466,81.197 ; U1.20@141.212,82.918 141.466,81.197 ; U1.20@141.212,82.918 141.466,81.197 ; U1.20@141.212,82.918 141.466,81.197 ; U1.20@141.212,82.918 141.466,81.197 ; U1.20@141.212,82.918 141.466,81.197 ; U1.20@141.212,82.918 141.466,81.197 ; 141.466,81.197 U1.20@142.043,82.839 ; 141.466,81.197 U1.20@141.72,82.918 ; 141.466,81.197 U1.20@141.466,82.937 ; 141.466,81.197 U1.20@142.043,82.839 ; 141.466,81.197 U1.20@141.72,82.918 ; 141.466,81.197 U1.20@141.466,82.937 ; 141.466,81.197 U1.20@142.043,82.839 ; 141.466,81.197 U1.20@141.72,82.918 ; 141.466,81.197 U1.20@141.466,82.937 ; 141.466,81.197 U1.20@142.043,82.839 ; 141.466,81.197 U1.20@141.72,82.918 ; 141.466,81.197 U1.20@141.466,82.937 ; 141.466,81.197 U1.20@142.043,82.839 ; 141.466,81.197 U1.20@141.72,82.918 ; 141.466,81.197 U1.20@141.466,82.937 ; 141.466,81.197 U1.20@142.043,82.839 ; 141.466,81.197 U1.20@141.72,82.918 ; 141.466,81.197 U1.20@141.466,82.937 ; 141.466,81.197 U1.20@142.043,82.839 ; 141.466,81.197 U1.20@141.72,82.918 ; 141.466,81.197 U1.20@141.466,82.937 ; P4.7@148.119,65.688 148.696,64.046 ; P4.7@148.119,65.688 148.696,64.046 ; P4.7@148.119,65.688 148.696,64.046 ; P4.7@148.119,65.688 148.696,64.046 ; P4.7@148.119,65.688 148.696,64.046 ; P4.7@148.119,65.688 148.696,64.046 ; P4.7@148.119,65.688 148.696,64.046 ; P4.7@148.442,65.767 148.696,64.046 ; P4.7@148.442,65.767 148.696,64.046 ; P4.7@148.442,65.767 148.696,64.046 ; P4.7@148.442,65.767 148.696,64.046 ; P4.7@148.442,65.767 148.696,64.046 ; P4.7@148.442,65.767 148.696,64.046 ; P4.7@148.442,65.767 148.696,64.046 ; 148.696,64.046 P4.7@149.273,65.688 ; 148.696,64.046 P4.7@148.95,65.767 ; 148.696,64.046 P4.7@148.696,65.786 ; 148.696,64.046 P4.7@149.273,65.688 ; 148.696,64.046 P4.7@148.95,65.767 ; 148.696,64.046 P4.7@148.696,65.786 ; 148.696,64.046 P4.7@149.273,65.688 ; 148.696,64.046 P4.7@148.95,65.767 ; 148.696,64.046 P4.7@148.696,65.786 ; 148.696,64.046 P4.7@149.273,65.688 ; 148.696,64.046 P4.7@148.95,65.767 ; 148.696,64.046 P4.7@148.696,65.786 ; 148.696,64.046 P4.7@149.273,65.688 ; 148.696,64.046 P4.7@148.95,65.767 ; 148.696,64.046 P4.7@148.696,65.786 ; 148.696,64.046 P4.7@149.273,65.688 ; 148.696,64.046 P4.7@148.95,65.767 ; 148.696,64.046 P4.7@148.696,65.786 ; 148.696,64.046 P4.7@149.273,65.688 ; 148.696,64.046 P4.7@148.95,65.767 ; 148.696,64.046 P4.7@148.696,65.786